# Altium PCB uTCA_MCH_PCB2_4_stub_template.PcbDoc
Units mm, origin at the board's own origin, x right, y up, seen from the top; angles counter-clockwise.
Board outline 41.18 x 75.03 mm, 2 copper layers (Top Layer, Bottom Layer); 1 components, 0 nets, 289 pads, 0 vias.
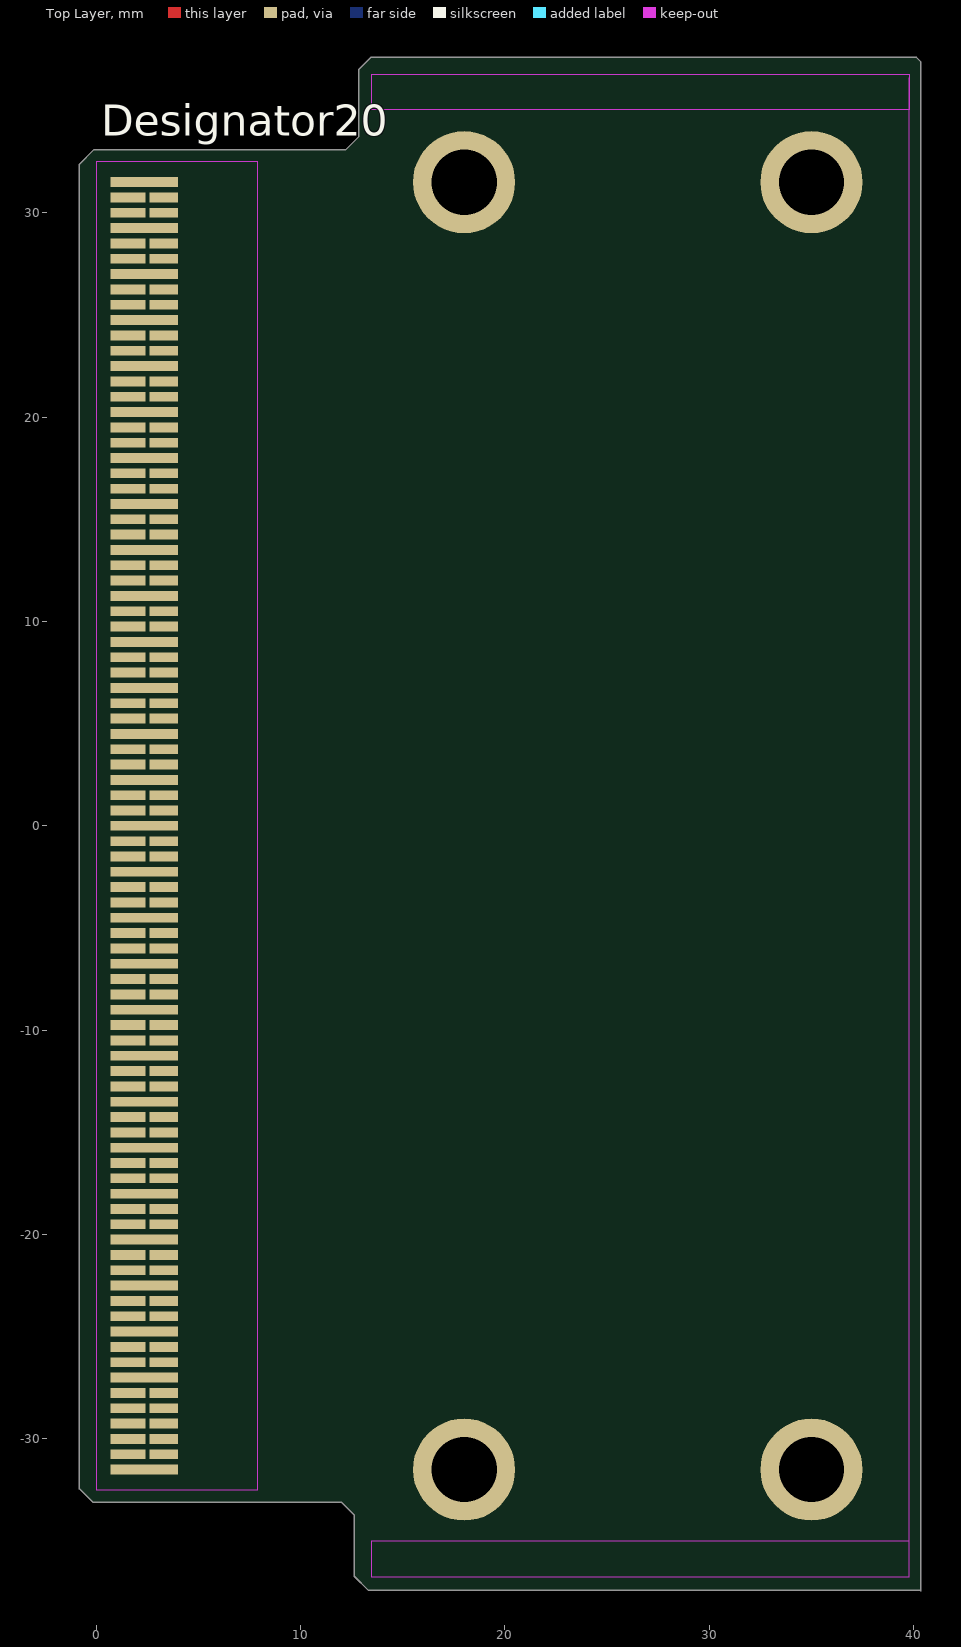
[diagram p0: Top Layer view]
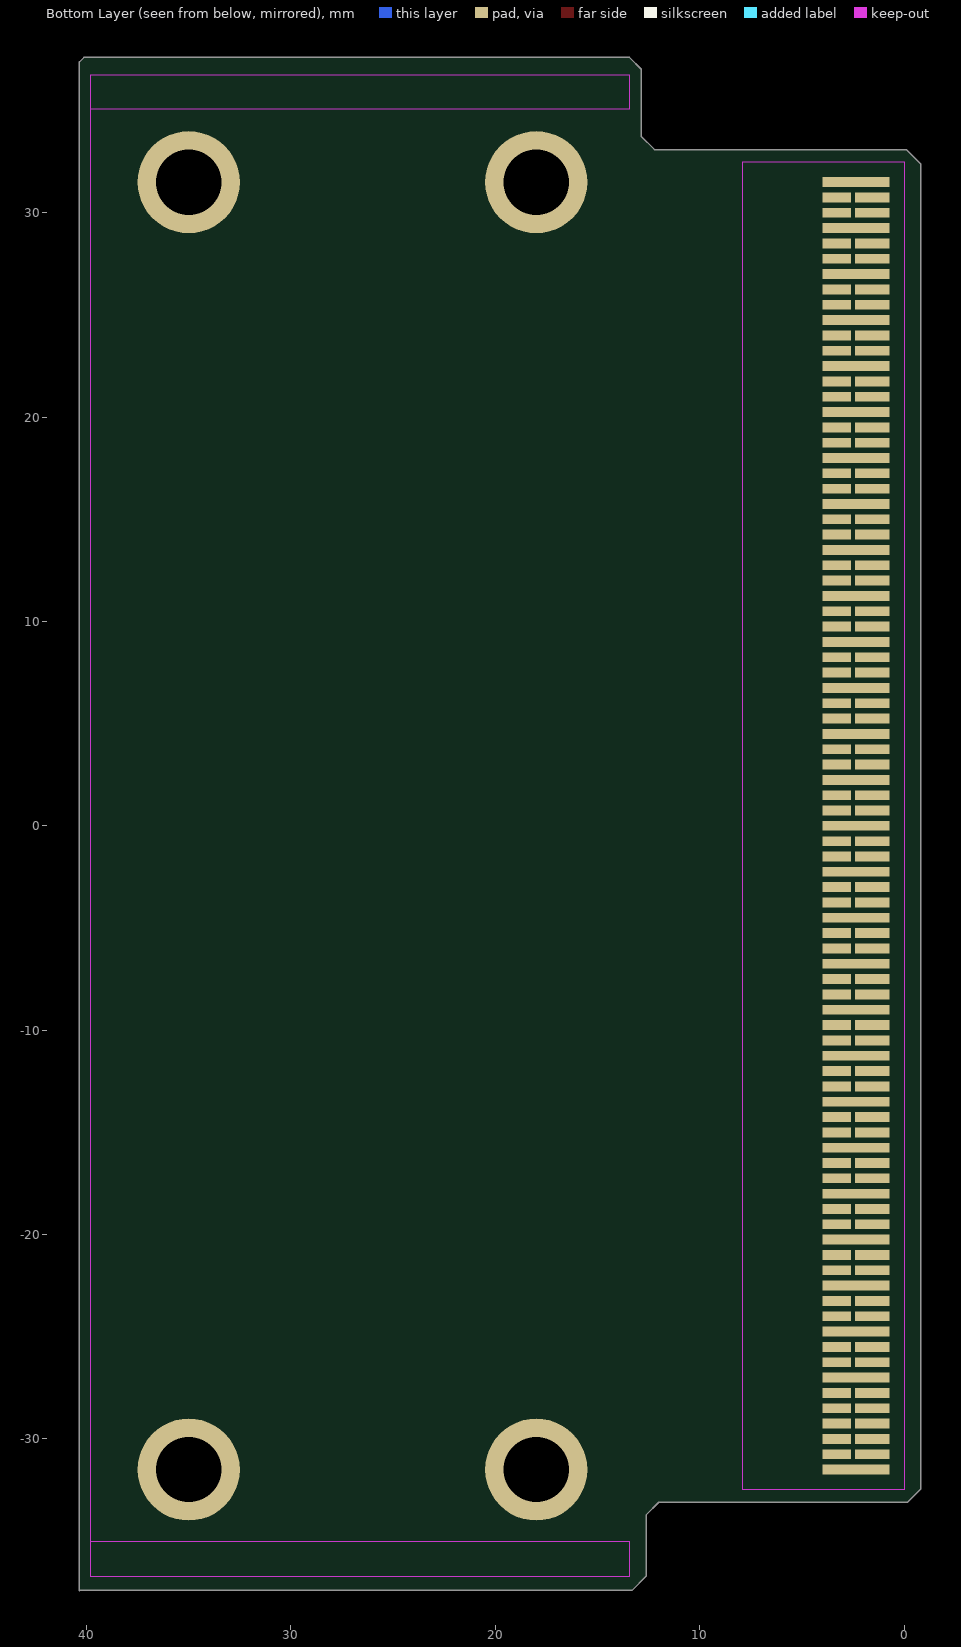
[diagram p1: Bottom Layer view, seen from below]

## Layer stack, top to bottom
Top Layer: signal copper 0.0356
Dielectric: dielectric 0.32, FR-4, Dk 4.8
Bottom Layer: signal copper 0.0356

## Board outline
-0.16,-33.105 12.008,-33.105 12.625,-33.722 12.625,-36.72 ccw(c12.63,-36.72) 12.626,-36.724 13.316,-37.414 ccw(c13.32,-37.41) 13.32,-37.415 40.338,-37.415 40.346,-37.424 ccw(c40.35,-37.42) 40.355,-37.42 40.355,37.38 ccw(c40.35,37.38) 40.354,37.384 40.134,37.604 ccw(c40.13,37.6) 40.13,37.605 13.44,37.605 ccw(c13.44,37.6) 13.436,37.604 12.856,37.024 ccw(c12.86,37.02) 12.855,37.02 12.855,33.732 12.218,33.095 -0.1,33.095 ccw(c-0.1,33.09) -0.104,33.094 -0.824,32.374 ccw(c-0.82,32.37) -0.825,32.37 -0.825,-32.44 ccw(c-0.82,-32.44) -0.824,-32.444 -0.164,-33.104 ccw(c-0.16,-33.1)

## Design rules (kind name [scope] priority, off if disabled: settings)
Clearance [All] p1: gap=0.254
HoleSize [All] p1: absolutevalues=TRUE maxlimit=3 minlimit=0.025 maxpercent=80.000 minpercent=20.000
PolygonConnect [All] p1: connectstyle=Relief reliefconductorwidth=0.254 reliefentries=4 polygonreliefangle="90 Angle"
RoutingVias [All] p1: holewidth=0.711 width=1.27 viastyle="Through Hole" minholewidth=0.711 minwidth=1.27 maxholewidth=0.711 maxwidth=1.27
SolderMaskExpansion [All] p1: expansion=0.102
TestPointUsage [All] p1: valid=0 allowmultiple=FALSE
Testpoint [All] p1: side=15 testpointundercomponent=TRUE minsize=1.016 maxsize=2.54 preferedsize=1.524 minholesize=0 maxholesize=1.016 preferedholesize=0.813 testpointgrid=0.025 style=1023 order=0-112345678
Width [All] p1: maxlimit=0.254 minlimit=0.254 preferedwidth=0.254
18 further rules are at their usual default settings.

## Components (designator, comment, footprint, x,y, rotation, side; value= is the part's Value field where it differs from the comment)
Designator20 "Comment" utca_mch_tongue2_3_4 0,0 r0 top locked

## Footprints (in the part's own frame and the unit in brackets; to place one, negate y for a bottom-side part, rotate by r counter-clockwise, add the part's x,y. Pads: shape width x height; smd on the part's side, far side on the other; paste and mask are expansions set on the pad)
utca_mch_tongue2_3_4 [mm] "uTCA MTCA.0 MCH tongue connector"
  rect 3.3x0.48 smd: 1(2.35,-31.5) 7(2.35,-27) 10(2.35,-24.75) 13(2.35,-22.5) 16(2.35,-20.25) 19(2.35,-18) 22(2.35,-15.75) 25(2.35,-13.5) 28(2.35,-11.25) 31(2.35,-9) 34(2.35,-6.75) 37(2.35,-4.5) 40(2.35,-2.25) 43(2.35,0) 46(2.35,2.25) 49(2.35,4.5) 52(2.35,6.75) 55(2.35,9) 58(2.35,11.25) 61(2.35,13.5) 64(2.35,15.75) 67(2.35,18) 70(2.35,20.25) 73(2.35,22.5) 76(2.35,24.75) 79(2.35,27) 82(2.35,29.25) 85(2.35,31.5)
  rect 1.4x0.48 smd: 2(3.3,-30.75) 3(3.3,-30) 4(3.3,-29.25) 5(3.3,-28.5) 6(3.3,-27.75) 8(3.3,-26.25) 9(3.3,-25.5) 11(3.3,-24) 12(3.3,-23.25) 14(3.3,-21.75) 15(3.3,-21) 17(3.3,-19.5) 18(3.3,-18.75) 20(3.3,-17.25) 21(3.3,-16.5) 23(3.3,-15) 24(3.3,-14.25) 26(3.3,-12.75) 27(3.3,-12) 29(3.3,-10.5) 30(3.3,-9.75) 32(3.3,-8.25) 33(3.3,-7.5) 35(3.3,-6) 36(3.3,-5.25) 38(3.3,-3.75) 39(3.3,-3) 41(3.3,-1.5) 42(3.3,-0.75) 44(3.3,0.75) 45(3.3,1.5) 47(3.3,3) 48(3.3,3.75) 50(3.3,5.25) 51(3.3,6) 53(3.3,7.5) 54(3.3,8.25) 56(3.3,9.75) 57(3.3,10.5) 59(3.3,12) 60(3.3,12.75) 62(3.3,14.25) 63(3.3,15) 65(3.3,16.5) 66(3.3,17.25) 68(3.3,18.75) 69(3.3,19.5) 71(3.3,21) 72(3.3,21.75) 74(3.3,23.25) 75(3.3,24) 77(3.3,25.5) 78(3.3,26.25) 80(3.3,27.75) 81(3.3,28.5) 83(3.3,30) 84(3.3,30.75)
  rect 1.7x0.48 smd: 3mate(1.55,-30.75) 3mate(1.55,-30) 3mate(1.55,-29.25) 3mate(1.55,-28.5) 3mate(1.55,-27.75) 3mate(1.55,-26.25) 3mate(1.55,-25.5) 3mate(1.55,-24) 3mate(1.55,-23.25) 3mate(1.55,-21.75) 3mate(1.55,-21) 3mate(1.55,-19.5) 3mate(1.55,-18.75) 3mate(1.55,-17.25) 3mate(1.55,-16.5) 3mate(1.55,-15) 3mate(1.55,-14.25) 3mate(1.55,-12.75) 3mate(1.55,-12) 3mate(1.55,-10.5) 3mate(1.55,-9.75) 3mate(1.55,-8.25) 3mate(1.55,-7.5) 3mate(1.55,-6) 3mate(1.55,-5.25) 3mate(1.55,-3.75) 3mate(1.55,-3) 3mate(1.55,-1.5) 3mate(1.55,-0.75) 3mate(1.55,0.75) 3mate(1.55,1.5) 3mate(1.55,3) 3mate(1.55,3.75) 3mate(1.55,5.25) 3mate(1.55,6) 3mate(1.55,7.5) 3mate(1.55,8.25) 3mate(1.55,9.75) 3mate(1.55,10.5) 3mate(1.55,12) 3mate(1.55,12.75) 3mate(1.55,14.25) 3mate(1.55,15) 3mate(1.55,16.5) 3mate(1.55,17.25) 3mate(1.55,18.75) 3mate(1.55,19.5) 3mate(1.55,21) 3mate(1.55,21.75) 3mate(1.55,23.25) 3mate(1.55,24) 3mate(1.55,25.5) 3mate(1.55,26.25) 3mate(1.55,27.75) 3mate(1.55,28.5) 3mate(1.55,30) 3mate(1.55,30.75)
  rect 1.7x0.48 smd far side: 3mate(1.55,-30.75) 3mate(1.55,-30) 3mate(1.55,-29.25) 3mate(1.55,-28.5) 3mate(1.55,-27.75) 3mate(1.55,-26.25) 3mate(1.55,-25.5) 3mate(1.55,-24) 3mate(1.55,-23.25) 3mate(1.55,-21.75) 3mate(1.55,-21) 3mate(1.55,-19.5) 3mate(1.55,-18.75) 3mate(1.55,-17.25) 3mate(1.55,-16.5) 3mate(1.55,-15) 3mate(1.55,-14.25) 3mate(1.55,-12.75) 3mate(1.55,-12) 3mate(1.55,-10.5) 3mate(1.55,-9.75) 3mate(1.55,-8.25) 3mate(1.55,-7.5) 3mate(1.55,-6) 3mate(1.55,-5.25) 3mate(1.55,-3.75) 3mate(1.55,-3) 3mate(1.55,-1.5) 3mate(1.55,-0.75) 3mate(1.55,0.75) 3mate(1.55,1.5) 3mate(1.55,3) 3mate(1.55,3.75) 3mate(1.55,5.25) 3mate(1.55,6) 3mate(1.55,7.5) 3mate(1.55,8.25) 3mate(1.55,9.75) 3mate(1.55,10.5) 3mate(1.55,12) 3mate(1.55,12.75) 3mate(1.55,14.25) 3mate(1.55,15) 3mate(1.55,16.5) 3mate(1.55,17.25) 3mate(1.55,18.75) 3mate(1.55,19.5) 3mate(1.55,21) 3mate(1.55,21.75) 3mate(1.55,23.25) 3mate(1.55,24) 3mate(1.55,25.5) 3mate(1.55,26.25) 3mate(1.55,27.75) 3mate(1.55,28.5) 3mate(1.55,30) 3mate(1.55,30.75)
  rect 3.3x0.48 smd far side: 86(2.35,31.5) 89(2.35,29.25) 92(2.35,27) 95(2.35,24.75) 98(2.35,22.5) 101(2.35,20.25) 104(2.35,18) 107(2.35,15.75) 110(2.35,13.5) 113(2.35,11.25) 116(2.35,9) 119(2.35,6.75) 122(2.35,4.5) 125(2.35,2.25) 128(2.35,0) 131(2.35,-2.25) 134(2.35,-4.5) 137(2.35,-6.75) 140(2.35,-9) 143(2.35,-11.25) 146(2.35,-13.5) 149(2.35,-15.75) 152(2.35,-18) 155(2.35,-20.25) 158(2.35,-22.5) 161(2.35,-24.75) 164(2.35,-27) 170(2.35,-31.5)
  rect 1.4x0.48 smd far side: 87(3.3,30.75) 88(3.3,30) 90(3.3,28.5) 91(3.3,27.75) 93(3.3,26.25) 94(3.3,25.5) 96(3.3,24) 97(3.3,23.25) 99(3.3,21.75) 100(3.3,21) 102(3.3,19.5) 103(3.3,18.75) 105(3.3,17.25) 106(3.3,16.5) 108(3.3,15) 109(3.3,14.25) 111(3.3,12.75) 112(3.3,12) 114(3.3,10.5) 115(3.3,9.75) 117(3.3,8.25) 118(3.3,7.5) 120(3.3,6) 121(3.3,5.25) 123(3.3,3.75) 124(3.3,3) 126(3.3,1.5) 127(3.3,0.75) 129(3.3,-0.75) 130(3.3,-1.5) 132(3.3,-3) 133(3.3,-3.75) 135(3.3,-5.25) 136(3.3,-6) 138(3.3,-7.5) 139(3.3,-8.25) 141(3.3,-9.75) 142(3.3,-10.5) 144(3.3,-12) 145(3.3,-12.75) 147(3.3,-14.25) 148(3.3,-15) 150(3.3,-16.5) 151(3.3,-17.25) 153(3.3,-18.75) 154(3.3,-19.5) 156(3.3,-21) 157(3.3,-21.75) 159(3.3,-23.25) 160(3.3,-24) 162(3.3,-25.5) 163(3.3,-26.25) 165(3.3,-27.75) 166(3.3,-28.5) 167(3.3,-29.25) 168(3.3,-30) 169(3.3,-30.75)
  rect 1.4x0.48 on Bottom Solder: 138(3.3,-7.5)
  Keep-Out Layer region: 0,-32.5 7.9,-32.5 7.9,32.5 0,32.5

## Free pads (board coordinates)
  round 5 hole 3.2 unplated: ""(18,-31.5) ""(18,31.5) ""(35,-31.5) ""(35,31.5)

## Nets (pads, with @x,y where several pads share a name; then routed paths per layer and width w, separated by ;. In a path a pad name is that pad's centre, name@x,y a point inside that pad or via, vN(x,y) a via of type N, cw(c..) or ccw(c..) an arc to the next point about the centre after c; other vN are vias at no path point)
pads on no net: Designator20.1 Designator20.2 Designator20.3 Designator20.3mate Designator20.4 Designator20.5 Designator20.6 Designator20.7 Designator20.8 Designator20.9 Designator20.10 Designator20.11 Designator20.12 Designator20.13 Designator20.14 Designator20.15 Designator20.16 Designator20.17 Designator20.18 Designator20.19 Designator20.20 Designator20.21 Designator20.22 Designator20.23 Designator20.24 Designator20.25 Designator20.26 Designator20.27 Designator20.28 Designator20.29 Designator20.30 Designator20.31 Designator20.32 Designator20.33 Designator20.34 Designator20.35 Designator20.36 Designator20.37 Designator20.38 Designator20.39 Designator20.40 Designator20.41 Designator20.42 Designator20.43 Designator20.44 Designator20.45 Designator20.46 Designator20.47 Designator20.48 Designator20.49 Designator20.50 Designator20.51 Designator20.52 Designator20.53 Designator20.54 Designator20.55 Designator20.56 Designator20.57 Designator20.58 Designator20.59 Designator20.60 Designator20.61 Designator20.62 Designator20.63 Designator20.64 Designator20.65 Designator20.66 Designator20.67 Designator20.68 Designator20.69 Designator20.70 Designator20.71 Designator20.72 Designator20.73 Designator20.74 Designator20.75 Designator20.76 Designator20.77 Designator20.78 Designator20.79 Designator20.80 Designator20.81 Designator20.82 Designator20.83 Designator20.84 Designator20.85 Designator20.86 Designator20.87 Designator20.88 Designator20.89 Designator20.90 Designator20.91 Designator20.92 Designator20.93 Designator20.94 Designator20.95 Designator20.96 Designator20.97 Designator20.98 Designator20.99 Designator20.100 Designator20.101 Designator20.102 Designator20.103 Designator20.104 Designator20.105 Designator20.106 Designator20.107 Designator20.108 Designator20.109 Designator20.110 Designator20.111 Designator20.112 Designator20.113 Designator20.114 Designator20.115 Designator20.116 Designator20.117 Designator20.118 Designator20.119 Designator20.120 Designator20.121 Designator20.122 Designator20.123 Designator20.124 Designator20.125 Designator20.126 Designator20.127 Designator20.128 Designator20.129 Designator20.130 Designator20.131 Designator20.132 Designator20.133 Designator20.134 Designator20.135 Designator20.136 Designator20.137 Designator20.138 Designator20.139 Designator20.140 Designator20.141 Designator20.142 Designator20.143 Designator20.144 Designator20.145 Designator20.146 Designator20.147 Designator20.148 Designator20.149 Designator20.150 Designator20.151 Designator20.152 Designator20.153 Designator20.154 Designator20.155 Designator20.156 Designator20.157 Designator20.158 Designator20.159 Designator20.160 Designator20.161 Designator20.162 Designator20.163 Designator20.164 Designator20.165 Designator20.166 Designator20.167 Designator20.168 Designator20.169 Designator20.170

## Keep-outs
Keep-Out Layer:
  rectangle: 13.45,35.06 39.8,36.75
  rectangle: 13.45,-36.75 39.79,-35.02
  lines w0.01: 39.79,-36.75 39.79,36.61

## Silkscreen, mask and mechanical layers (free items; w line width, h text height)
Top Solder:
  rectangle: 153.45,-35.7 180.6,-31.2
  rectangle: 146.75,-36.75 158.05,-35.05
  rectangle: 13.45,35.15 157,36.75
  rectangle: 157.2,36.25 162.45,36.75
  rectangle: 156.65,31.65 157.75,36.75
Mechanical 1:
  lines w0.01: 9.271,-32.5 12.45,-32.5 cw(c12.45,-33.5) 13.45,-33.5 13.45,-36.3 ; 9.55,32.5 12.434,32.5 ; 12.4,32.5 ccw(c12.425,33.525) 13.45,33.5 13.45,36.25 cw(c13.95,36.25) 13.95,36.75 39.8,36.75 39.8,-36.75 13.9,-36.75 ; 13.45,-36.25 ccw(c13.95,-36.25) 13.95,-36.75
Mechanical 15:
  circle w0.01: c6.75,-31.5 r0.206
  circle w0.01: c6.75,31.5 r0.212
  lines w0.01: 6.35,-31.5 7.2,-31.5 ; 6.35,31.5 7.2,31.5 ; 6.75,-31.9 6.75,-31.1 ; 6.75,31.1 6.75,31.9
  text "Edge connector markings" at 9.95,-32.1 h0.7